# Altium PCB amc3302-v1.02.PcbDoc (part 2 of 2)
Units mm, origin at the board's own origin, x right, y up, seen from the top; angles counter-clockwise.
Board outline 100 x 75 mm, 4 copper layers (Top Layer, GND, VCC, Bottom Layer), stack 1.592 mm thick; 98 components, 51 nets, 268 pads, 520 vias.
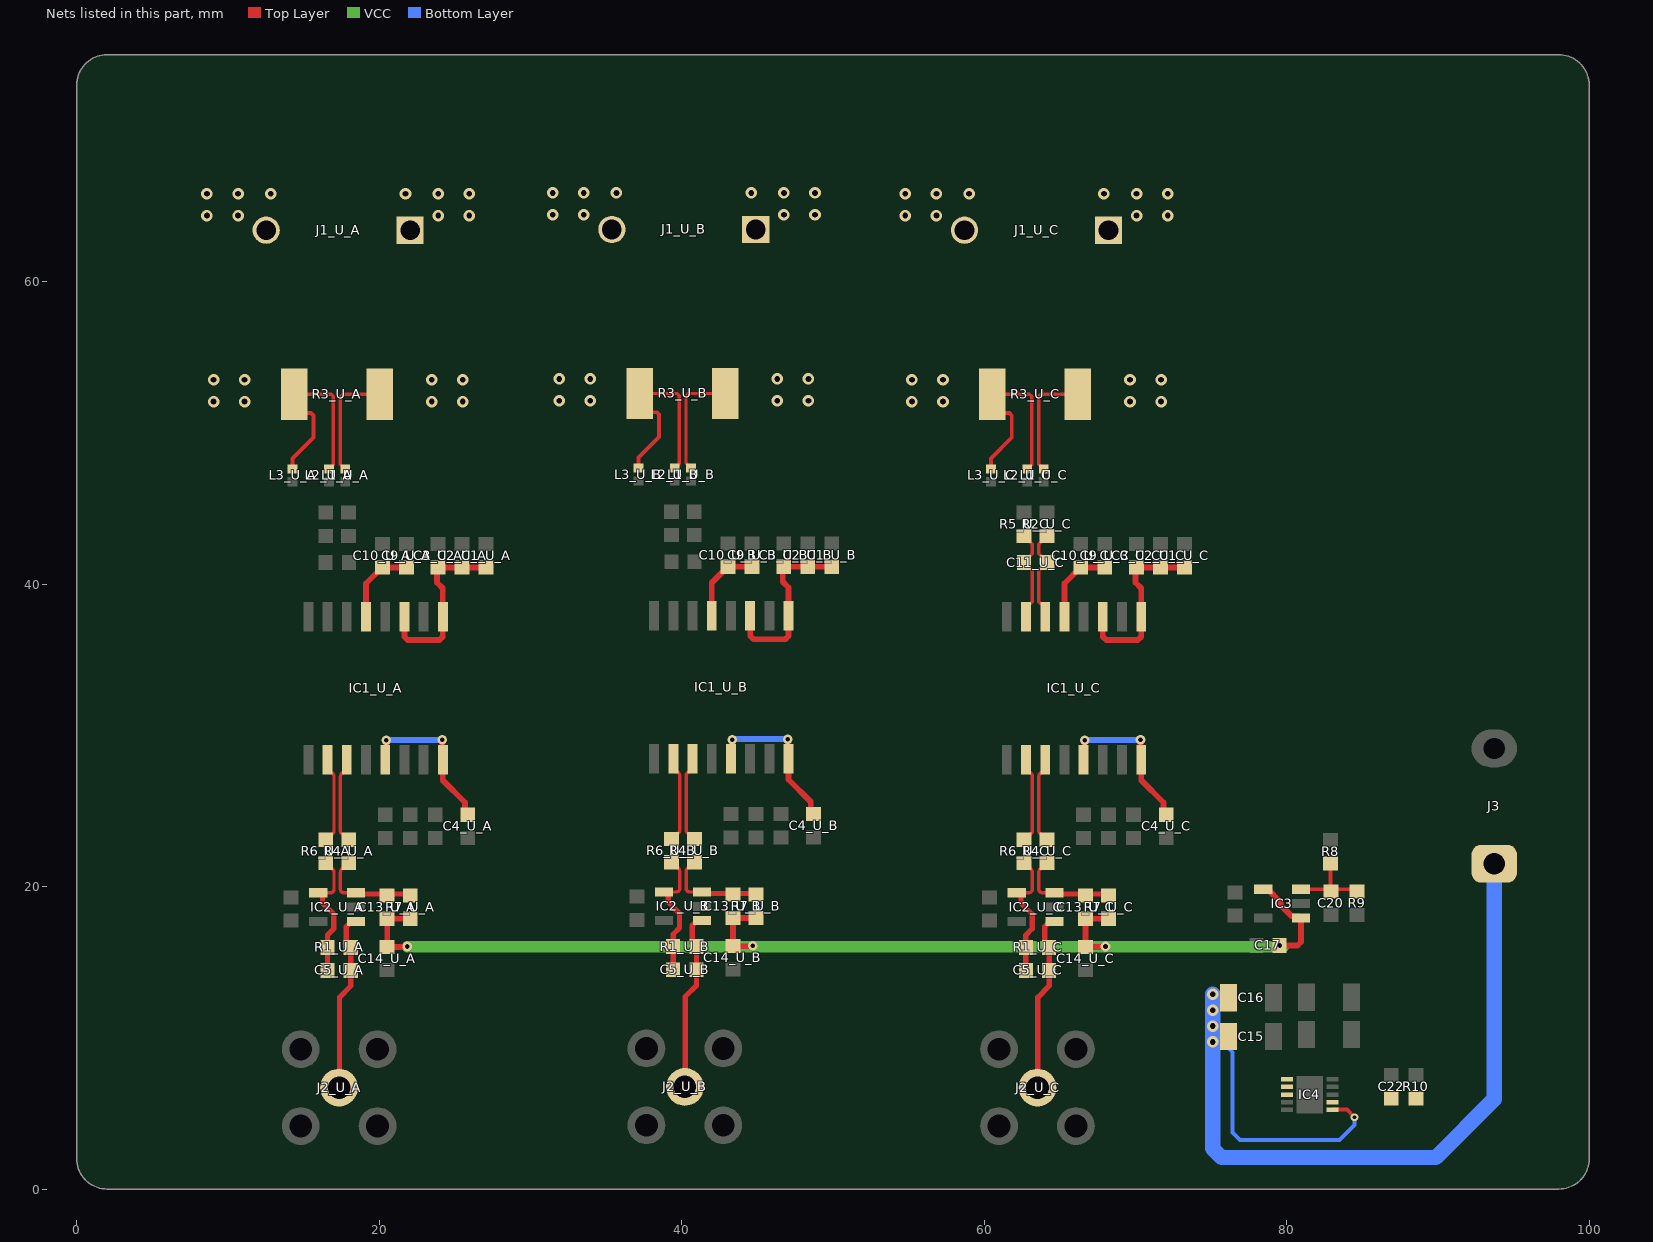
[diagram p4: the nets of this part, all layers, seen from the top]

## Via types
v1: diameter 0.559, hole 0.254, Top Layer to Bottom Layer, tented both sides, 284 vias
v2: diameter 0.635, hole 0.305, Top Layer to Bottom Layer, tented both sides, 115 vias
v3: diameter 0.508, hole 0.254, Top Layer to Bottom Layer, tented both sides, 62 vias
v4: diameter 0.762, hole 0.381, Top Layer to Bottom Layer, tented both sides, 58 vias
v5: diameter 0.508, hole 0.305, Top Layer to Bottom Layer, tented both sides, 1 vias

## Nets (pads, with @x,y where several pads share a name; then routed paths per layer and width w, separated by ;. In a path a pad name is that pad's centre, name@x,y a point inside that pad or via, vN(x,y) a via of type N, cw(c..) or ccw(c..) an arc to the next point about the centre after c; other vN are vias at no path point) (continued)
In_ic_U_C_N: C11_U_C.2 IC1_U_C.7 R5_U_C.2 | length 6.3
  Top Layer w0.22: R5_U_C.2@62.637,43.191 62.662,43.191 63.017,42.836 63.017,42.811 63.178,42.649 63.178,41.995 62.628,41.446 62.628,41.396 62.983,41.041 63.057,41.041 63.187,40.912 63.187,38.841 63.057,38.711 62.978,38.711 62.763,38.497 IC1_U_C.7@62.763,37.847
In_ic_U_C_P: C11_U_C.1 IC1_U_C.6 R2_U_C.2 | length 6.3
  Top Layer w0.22: IC1_U_C.6@64.033,37.847 64.033,38.497 63.819,38.711 63.739,38.711 63.61,38.841 63.61,40.912 63.739,41.041 63.814,41.041 64.168,41.396 64.168,41.446 63.602,42.012 63.602,42.642 63.771,42.811 63.771,42.836 64.126,43.191 R2_U_C.2@64.151,43.191
In_U_A_N: J1_U_A.2 L2_U_A.1 L3_U_A.1 R3_U_A.1 | length 13.8
  Top Layer w0.22: R3_U_A.1@14.371,52.554 16.818,52.554 16.967,52.405 16.967,47.885 16.7,47.618 L2_U_A.1@16.675,47.618
  Top Layer w0.254: L3_U_A.1@14.275,47.618 14.275,48.311 15.646,49.682 15.646,51.159 15.498,51.308 15.119,51.308 14.371,52.056 R3_U_A.1@14.371,52.554
  other v4: 9.042,52.07 11.1,52.07 9.042,53.518 11.1,53.518 8.611,64.364 10.668,64.364 8.611,65.811 10.668,65.811 12.827,65.811
In_U_A_P: J1_U_A.1 L1_U_A.1 R3_U_A.2 | length 7.6
  Top Layer w0.22: L1_U_A.1@17.758,47.618 17.733,47.618 17.424,47.926 17.424,52.405 17.573,52.554 R3_U_A.2@20.021,52.554
  other v4: 23.465,52.07 25.522,52.07 23.465,53.518 25.522,53.518 23.896,64.364 25.954,64.364 21.737,65.811 23.896,65.811 25.954,65.811
In_U_B_N: J1_U_B.2 L2_U_B.1 L3_U_B.1 R3_U_B.1 | length 13.8
  Top Layer w0.22: R3_U_B.1@37.231,52.605 39.678,52.605 39.827,52.456 39.827,47.936 39.56,47.669 L2_U_B.1@39.535,47.669
  Top Layer w0.254: L3_U_B.1@37.135,47.669 37.135,48.362 38.506,49.733 38.506,51.21 38.358,51.359 37.979,51.359 37.231,52.107 R3_U_B.1@37.231,52.605
  other v4: 31.902,52.121 33.96,52.121 31.902,53.569 33.96,53.569 31.471,64.414 33.528,64.414 31.471,65.862 33.528,65.862 35.687,65.862
In_U_B_P: J1_U_B.1 L1_U_B.1 R3_U_B.2 | length 7.6
  Top Layer w0.22: L1_U_B.1@40.618,47.669 40.593,47.669 40.284,47.977 40.284,52.456 40.433,52.605 R3_U_B.2@42.881,52.605
  other v4: 46.325,52.121 48.382,52.121 46.325,53.569 48.382,53.569 46.756,64.414 48.814,64.414 44.597,65.862 46.756,65.862 48.814,65.862
In_U_C_N: J1_U_C.2 L2_U_C.1 L3_U_C.1 R3_U_C.1 | length 13.8
  Top Layer w0.22: R3_U_C.1@60.548,52.554 62.996,52.554 63.144,52.405 63.144,47.885 62.878,47.618 L2_U_C.1@62.853,47.618
  Top Layer w0.254: L3_U_C.1@60.452,47.618 60.452,48.311 61.824,49.682 61.824,51.159 61.675,51.308 61.296,51.308 60.548,52.056 R3_U_C.1@60.548,52.554
  other v4: 55.22,52.07 57.277,52.07 55.22,53.518 57.277,53.518 54.788,64.364 56.845,64.364 54.788,65.811 56.845,65.811 59.004,65.811
In_U_C_P: J1_U_C.1 L1_U_C.1 R3_U_C.2 | length 7.6
  Top Layer w0.22: L1_U_C.1@63.935,47.618 63.91,47.618 63.602,47.926 63.602,52.405 63.75,52.554 R3_U_C.2@66.198,52.554
  other v4: 69.642,52.07 71.699,52.07 69.642,53.518 71.699,53.518 70.074,64.364 72.131,64.364 67.915,65.811 70.074,65.811 72.131,65.811
NetC1_U_A_1: C1_U_A.1 C2_U_A.1 C3_U_A.1 IC1_U_A.1 IC1_U_A.3 | length 12
  Top Layer w0.381: IC1_U_A.3@21.666,37.847 21.666,36.52 21.889,36.297 23.983,36.297 24.206,36.52 IC1_U_A.1@24.206,37.847 24.206,39.726 23.825,40.107 23.825,41.033 C3_U_A.1@23.889,41.097 C2_U_A.1@25.476,41.097 C1_U_A.1@27.063,41.097
NetC1_U_B_1: C1_U_B.1 C2_U_B.1 C3_U_B.1 IC1_U_B.1 IC1_U_B.3 | length 12
  Top Layer w0.381: IC1_U_B.3@44.526,37.897 44.526,36.571 44.749,36.347 46.843,36.347 47.066,36.571 IC1_U_B.1@47.066,37.897 47.066,39.776 46.685,40.157 46.685,41.084 C3_U_B.1@46.749,41.148 C2_U_B.1@48.336,41.148 C1_U_B.1@49.923,41.148
NetC1_U_C_1: C1_U_C.1 C2_U_C.1 C3_U_C.1 IC1_U_C.1 IC1_U_C.3 | length 12
  Top Layer w0.381: IC1_U_C.3@67.843,37.847 67.843,36.52 68.067,36.297 70.16,36.297 70.383,36.52 IC1_U_C.1@70.383,37.847 70.383,39.726 70.002,40.107 70.002,41.033 C3_U_C.1@70.066,41.097 C2_U_C.1@71.653,41.097 C1_U_C.1@73.241,41.097
NetC4_U_A_1: C4_U_A.1 IC1_U_A.13 IC1_U_A.16 | length 10.7
  Top Layer w0.381: IC1_U_A.13@20.396,28.397 20.476,28.477 v2(20.476,29.663) ; v2(24.161,29.698) 24.161,28.441 IC1_U_A.16@24.206,28.397 24.206,27.026 25.671,25.561 25.671,24.934 C4_U_A.1@25.857,24.748
  Bottom Layer w0.381: v2(20.476,29.663) 20.512,29.698 v2(24.161,29.698)
NetC4_U_B_1: C4_U_B.1 IC1_U_B.13 IC1_U_B.16 | length 10.7
  Top Layer w0.381: IC1_U_B.13@43.256,28.447 43.336,28.528 v2(43.336,29.713) ; v2(47.021,29.749) 47.021,28.492 IC1_U_B.16@47.066,28.447 47.066,27.076 48.531,25.612 48.531,24.985 C4_U_B.1@48.717,24.798
  Bottom Layer w0.381: v2(43.336,29.713) 43.372,29.749 v2(47.021,29.749)
NetC4_U_C_1: C4_U_C.1 IC1_U_C.13 IC1_U_C.16 | length 10.7
  Top Layer w0.381: IC1_U_C.13@66.573,28.397 66.654,28.477 v2(66.654,29.663) ; v2(70.339,29.698) 70.339,28.441 IC1_U_C.16@70.383,28.397 70.383,27.026 71.848,25.561 71.848,24.934 C4_U_C.1@72.034,24.748
  Bottom Layer w0.381: v2(66.654,29.663) 66.689,29.698 v2(70.339,29.698)
NetC9_U_A_1: C9_U_A.1 C10_U_A.1 IC1_U_A.5 | length 5.3
  Top Layer w0.381: IC1_U_A.5@19.126,37.847 19.126,40.042 20.181,41.097 C10_U_A.1@20.206,41.097 C9_U_A.1@21.794,41.097
NetC9_U_B_1: C9_U_B.1 C10_U_B.1 IC1_U_B.5 | length 5.3
  Top Layer w0.381: IC1_U_B.5@41.986,37.897 41.986,40.093 43.041,41.148 C10_U_B.1@43.066,41.148 C9_U_B.1@44.654,41.148
NetC9_U_C_1: C9_U_C.1 C10_U_C.1 IC1_U_C.5 | length 5.3
  Top Layer w0.381: IC1_U_C.5@65.303,37.847 65.303,40.042 66.359,41.097 C10_U_C.1@66.384,41.097 C9_U_C.1@67.971,41.097
NetC20_2: C20.2 IC3.3 R8.1 R9.2 | length 5.4
  Top Layer w0.254: IC3.3@80.955,19.822 C20.2@82.972,19.822 ; R8.1@82.906,21.531 82.906,19.888 C20.2@82.972,19.822 ; C20.2@82.982,19.812 C20.2@82.972,19.822 ; C20.2@82.982,19.822 84.592,19.822 R9.2@84.607,19.837
NetC22_1: C22.1 IC4.7 R10.1
op_U_A_N: C5_U_A.1 IC2_U_A.4 R1_U_A.1 R6_U_A.2 | length 8.8
  Top Layer w0.22: IC2_U_A.4@16.125,19.594 16.789,19.594 ccw(c16.789,19.814) 16.945,19.658 ccw(c16.789,19.814) 17.009,19.814 17.009,20.923 ccw(c16.648,20.923) 16.904,21.178 ccw(c16.847,21.122) 16.847,21.202 cw(c16.847,21.282) 16.791,21.225 R6_U_A.2@16.459,21.557
  Top Layer w0.349: IC2_U_A.4@15.971,19.594 16.125,19.594 16.25,19.468 16.25,18.921 17,18.171 17,17.216 16.578,16.794 R1_U_A.1@16.578,15.977 C5_U_A.1@16.578,14.453
op_U_A_P: C13_U_A.2 IC2_U_A.3 R4_U_A.2 R7_U_A.2 | length 6.8
  Top Layer w0.22: R4_U_A.2@17.983,21.557 17.652,21.225 cw(c17.595,21.282) 17.595,21.202 ccw(c17.595,21.122) 17.539,21.178 ccw(c17.794,20.923) 17.433,20.923 17.433,19.814 ccw(c17.654,19.814) 17.498,19.658 ccw(c17.654,19.814) 17.654,19.594 IC2_U_A.3@18.471,19.594
  Top Layer w0.33: IC2_U_A.3@18.471,19.594 18.561,19.504 21.957,19.504 R7_U_A.2@22.047,19.414
op_U_B_N: C5_U_B.1 IC2_U_B.4 R1_U_B.1 R6_U_B.2 | length 8.8
  Top Layer w0.22: IC2_U_B.4@38.985,19.644 39.649,19.644 ccw(c39.649,19.865) 39.805,19.709 ccw(c39.649,19.865) 39.869,19.865 39.869,20.974 ccw(c39.508,20.974) 39.764,21.229 ccw(c39.707,21.173) 39.707,21.253 cw(c39.707,21.333) 39.651,21.276 R6_U_B.2@39.319,21.607
  Top Layer w0.349: IC2_U_B.4@38.831,19.644 38.985,19.644 39.11,19.519 39.11,18.972 39.86,18.222 39.86,17.267 39.438,16.845 R1_U_B.1@39.438,16.027 C5_U_B.1@39.438,14.503
op_U_B_P: C13_U_B.2 IC2_U_B.3 R4_U_B.2 R7_U_B.2 | length 6.8
  Top Layer w0.22: R4_U_B.2@40.843,21.607 40.512,21.276 cw(c40.455,21.333) 40.455,21.253 ccw(c40.455,21.173) 40.399,21.229 ccw(c40.654,20.974) 40.293,20.974 40.293,19.865 ccw(c40.514,19.865) 40.358,19.709 ccw(c40.514,19.865) 40.514,19.644 IC2_U_B.3@41.331,19.644
  Top Layer w0.33: IC2_U_B.3@41.331,19.644 41.421,19.554 44.817,19.554 R7_U_B.2@44.907,19.464
op_U_C_N: C5_U_C.1 IC2_U_C.4 R1_U_C.1 R6_U_C.2 | length 8.8
  Top Layer w0.22: IC2_U_C.4@62.302,19.594 62.966,19.594 ccw(c62.966,19.814) 63.122,19.658 ccw(c62.966,19.814) 63.187,19.814 63.187,20.923 ccw(c62.826,20.923) 63.081,21.178 ccw(c63.024,21.122) 63.024,21.202 cw(c63.024,21.282) 62.968,21.225 R6_U_C.2@62.636,21.557
  Top Layer w0.349: IC2_U_C.4@62.148,19.594 62.302,19.594 62.427,19.468 62.427,18.921 63.177,18.171 63.177,17.216 62.755,16.794 R1_U_C.1@62.755,15.977 C5_U_C.1@62.755,14.453
op_U_C_P: C13_U_C.2 IC2_U_C.3 R4_U_C.2 R7_U_C.2 | length 6.8
  Top Layer w0.22: R4_U_C.2@64.16,21.557 63.829,21.225 cw(c63.773,21.282) 63.773,21.202 ccw(c63.773,21.122) 63.716,21.178 ccw(c63.971,20.923) 63.61,20.923 63.61,19.814 ccw(c63.831,19.814) 63.675,19.658 ccw(c63.831,19.814) 63.831,19.594 IC2_U_C.3@64.648,19.594
  Top Layer w0.33: IC2_U_C.3@64.648,19.594 64.738,19.504 68.134,19.504 R7_U_C.2@68.224,19.414
out_U_A: C5_U_A.2 IC2_U_A.1 J2_U_A.1 R1_U_A.2 | length 11.9
  Top Layer w0.349: J2_U_A.1@17.348,6.706 17.374,6.731 17.374,12.675 18.118,13.419 C5_U_A.2@18.118,14.453 R1_U_A.2@18.118,15.977 17.828,16.267 17.828,17.364 18.032,17.568 18.346,17.568 IC2_U_A.1@18.471,17.694
Out_U_A_N: IC1_U_A.10 R6_U_A.1 | length 5.7
  Top Layer w0.22: R6_U_A.1@16.459,23.097 16.791,23.428 cw(c16.847,23.371) 16.847,23.451 ccw(c16.847,23.531) 16.904,23.475 16.945,23.516 ccw(c16.789,23.672) 17.009,23.672 17.009,27.26 ccw(c16.664,27.26) 16.908,27.504 ccw(c16.841,27.436) 16.841,27.532 cw(c16.841,27.627) 16.773,27.56 16.694,27.639 cw(c16.953,27.898) 16.586,27.898 IC1_U_A.10@16.586,28.397
Out_U_A_P: IC1_U_A.11 R4_U_A.1 | length 5.7
  Top Layer w0.22: IC1_U_A.11@17.856,28.397 17.856,27.898 cw(c17.49,27.898) 17.749,27.639 17.669,27.56 cw(c17.602,27.627) 17.602,27.532 ccw(c17.602,27.436) 17.534,27.504 ccw(c17.778,27.26) 17.433,27.26 17.433,23.672 ccw(c17.654,23.672) 17.498,23.516 17.539,23.475 ccw(c17.595,23.531) 17.595,23.451 cw(c17.595,23.371) 17.652,23.428 R4_U_A.1@17.983,23.097
out_U_B: C5_U_B.2 IC2_U_B.1 J2_U_B.1 R1_U_B.2 | length 11.9
  Top Layer w0.349: J2_U_B.1@40.208,6.756 40.234,6.782 40.234,12.725 40.978,13.47 C5_U_B.2@40.978,14.503 R1_U_B.2@40.978,16.027 40.688,16.318 40.688,17.414 40.892,17.619 41.206,17.619 IC2_U_B.1@41.331,17.744
Out_U_B_N: IC1_U_B.10 R6_U_B.1 | length 5.7
  Top Layer w0.22: R6_U_B.1@39.319,23.147 39.651,23.479 cw(c39.707,23.422) 39.707,23.502 ccw(c39.707,23.582) 39.764,23.525 39.805,23.567 ccw(c39.649,23.723) 39.869,23.723 39.869,27.31 ccw(c39.524,27.31) 39.768,27.555 ccw(c39.701,27.487) 39.701,27.583 cw(c39.701,27.678) 39.633,27.611 39.554,27.69 cw(c39.813,27.949) 39.446,27.949 IC1_U_B.10@39.446,28.447
Out_U_B_P: IC1_U_B.11 R4_U_B.1 | length 5.7
  Top Layer w0.22: IC1_U_B.11@40.716,28.447 40.716,27.949 cw(c40.35,27.949) 40.609,27.69 40.529,27.611 cw(c40.462,27.678) 40.462,27.583 ccw(c40.462,27.487) 40.394,27.555 ccw(c40.638,27.31) 40.293,27.31 40.293,23.723 ccw(c40.514,23.723) 40.358,23.567 40.399,23.526 ccw(c40.455,23.582) 40.455,23.502 cw(c40.455,23.422) 40.512,23.479 R4_U_B.1@40.843,23.147
out_U_C: C5_U_C.2 IC2_U_C.1 J2_U_C.1 R1_U_C.2 | length 11.9
  Top Layer w0.349: J2_U_C.1@63.525,6.706 63.551,6.731 63.551,12.675 64.295,13.419 C5_U_C.2@64.295,14.453 R1_U_C.2@64.295,15.977 64.005,16.267 64.005,17.364 64.21,17.568 64.523,17.568 IC2_U_C.1@64.648,17.694
Out_U_C_N: IC1_U_C.10 R6_U_C.1 | length 5.7
  Top Layer w0.22: R6_U_C.1@62.636,23.097 62.968,23.428 cw(c63.024,23.371) 63.024,23.451 ccw(c63.024,23.531) 63.081,23.475 63.122,23.516 ccw(c62.966,23.672) 63.187,23.672 63.187,27.26 ccw(c62.841,27.26) 63.085,27.504 ccw(c63.018,27.436) 63.018,27.532 cw(c63.018,27.627) 62.95,27.56 62.871,27.639 cw(c63.13,27.898) 62.763,27.898 IC1_U_C.10@62.763,28.397
Out_U_C_P: IC1_U_C.11 R4_U_C.1 | length 5.7
  Top Layer w0.22: IC1_U_C.11@64.033,28.397 64.033,27.898 cw(c63.667,27.898) 63.926,27.639 63.847,27.56 cw(c63.779,27.627) 63.779,27.532 ccw(c63.779,27.436) 63.711,27.504 ccw(c63.956,27.26) 63.61,27.26 63.61,23.672 ccw(c63.831,23.672) 63.675,23.516 63.716,23.475 ccw(c63.773,23.531) 63.773,23.451 cw(c63.773,23.371) 63.829,23.428 R4_U_C.1@64.16,23.097
Vin: C15.1 C16.1 IC4.1 IC4.2 IC4.3 IC4.6 J3.1 | length 63.1
  Top Layer w0.254: IC4.6@83.034,5.248 83.982,5.248 v3(84.48,4.75)
  Bottom Layer w0.254: 75.844,9.398 76.073,9.398 76.429,9.042 76.429,3.734 76.911,3.251 83.49,3.251 84.48,4.242 v3(84.48,4.75)
  Bottom Layer w1.016: v4(75.108,12.878) v4(75.108,11.828) v4(75.108,10.778) v4(75.108,9.728) 75.108,2.678 75.703,2.083 89.865,2.083 93.726,5.944 J3.1@93.726,21.514
Vref: C13_U_A.1 C13_U_B.1 C13_U_C.1 C14_U_A.2 C14_U_B.2 C14_U_C.2 C17.2 IC3.1 IC3.4 R7_U_A.1 R7_U_B.1 R7_U_C.1 | length 78.3
  Top Layer w0.381: C14_U_A.2@20.523,16.01 C13_U_A.1@20.523,17.874 R7_U_A.1@22.047,17.874 ; C14_U_A.2@20.532,16.001 v2@21.802,16.001 ; v2@44.662,16.052 43.606,16.052 43.383,16.275 C13_U_B.1@43.383,17.924 R7_U_B.1@44.907,17.924 ; C14_U_C.2@66.7,16.01 C13_U_C.1@66.7,17.874 R7_U_C.1@68.224,17.874 ; C14_U_C.2@66.709,16.001 v2@67.979,16.001 ; IC3.4@78.455,19.822 78.755,19.822 79.602,18.976 79.602,18.769 80.339,18.032 80.846,18.032 IC3.1@80.955,17.922 80.955,16.338 80.721,16.104 v5(79.535,16.104)
  VCC w0.762: v2(21.844,16.035) v5@79.764,16.035
  other v2: 68.021,16.035 44.704,16.086
pads on no net: IC1_U_A.4 IC1_U_A.14 IC1_U_B.4 IC1_U_B.14 IC1_U_C.4 IC1_U_C.14 IC4.4

## Polygon pours and split planes (outlines as drawn)
GND on Top Layer "GND_L01_P012" (solid, remove dead copper, pour order 49): 9.55,29.896 9.55,1.778 10.744,0.584 93.447,0.584 96.266,3.404 96.266,29.921 94.996,31.191 10.846,31.191
In_U_C_P on Top Layer "IN_U_C_P_L01_P007" (solid, pour order 36): 73.325,51.206 72.995,50.876 66.365,50.876 66.365,53.315 65.603,54.077 65.603,66.77 65.908,67.056 72.918,67.056 73.325,66.65
In_U_C_N on Top Layer "IN_U_C_N_L01_P016" (solid, pour order 55): 53.594,51.206 53.924,50.876 60.554,50.876 60.554,53.315 61.316,54.077 61.316,66.77 61.011,67.056 54,67.056 53.594,66.65
NetC1_U_C_1 on Top Layer "NETC1_U_C_1_L01_P011" (solid, pour order 48): 69.596,41.453 69.596,40.056 70.256,39.395 73.355,39.395 73.889,39.929 73.889,41.478 73.812,41.554 69.647,41.554
HGND_U_C on Top Layer "HGND_U_C_L01_P008" (solid, pour order 39): 65.456,45.212 65.456,42.469 65.837,42.088 73.838,42.088 73.838,42.113 74.32,42.596 74.32,45.161 73.939,45.542 65.786,45.542
HGND_U_C on Top Layer "HGND_U_C_L01_P010" (solid, pour order 45): 61.849,38.71 61.595,38.964 61.595,40.284 61.062,40.818 61.062,46.355 60.731,46.685 59.919,46.685 59.69,46.457 59.69,39.497 61.379,37.808 61.798,38.227 61.798,38.71
+3V3 on Top Layer "+3V3_L01_P000" (solid, pour order 24): 65.507,27.838 65.938,27.407 65.938,26.821 66.376,26.383 68.841,26.383 70.307,24.917 70.307,24.46 65.532,24.46 64.999,24.994 64.999,27.48
NetC9_U_C_1 on Top Layer "NETC9_U_C_1_L01_P009" (solid, pour order 42): 66.472,39.599 67.843,39.599 68.478,40.234 68.478,41.427 68.377,41.529 65.608,41.529 64.973,40.894 64.973,38.735 65.608,38.735
In_U_B_P on Top Layer "IN_U_B_P_L01_P007" (solid, pour order 35): 50.008,51.257 49.677,50.927 43.048,50.927 43.048,53.365 42.286,54.127 42.286,66.821 42.591,67.107 49.601,67.107 50.008,66.7
In_U_B_N on Top Layer "IN_U_B_N_L01_P016" (solid, pour order 54): 30.277,51.257 30.607,50.927 37.236,50.927 37.236,53.365 37.998,54.127 37.998,66.821 37.694,67.107 30.683,67.107 30.277,66.7
NetC1_U_B_1 on Top Layer "NETC1_U_B_1_L01_P011" (solid, pour order 47): 46.279,41.504 46.279,40.107 46.939,39.446 50.038,39.446 50.571,39.98 50.571,41.529 50.495,41.605 46.33,41.605
HGND_U_B on Top Layer "HGND_U_B_L01_P008" (solid, pour order 38): 42.139,45.263 42.139,42.52 42.52,42.139 50.521,42.139 50.521,42.164 51.003,42.647 51.003,45.212 50.622,45.593 42.469,45.593
HGND_U_B on Top Layer "HGND_U_B_L01_P010" (solid, pour order 44): 38.532,38.76 38.278,39.014 38.278,40.335 37.744,40.869 37.744,46.406 37.414,46.736 36.601,46.736 36.373,46.507 36.373,39.548 38.062,37.859 38.481,38.278 38.481,38.76
+3V3 on Top Layer "+3V3_L01_P000" (solid, pour order 23): 42.189,27.889 42.621,27.457 42.621,26.872 43.059,26.434 45.524,26.434 46.99,24.968 46.99,24.511 42.215,24.511 41.681,25.044 41.681,27.531
NetC9_U_B_1 on Top Layer "NETC9_U_B_1_L01_P009" (solid, pour order 41): 43.155,39.649 44.526,39.649 45.161,40.284 45.161,41.478 45.06,41.58 42.291,41.58 41.656,40.945 41.656,38.786 42.291,38.786
In_U_A_N on Top Layer "IN_U_A_N_L01_P016" (solid, pour order 53): 7.417,51.206 7.747,50.876 14.376,50.876 14.376,53.315 15.138,54.077 15.138,66.77 14.834,67.056 7.823,67.056 7.417,66.65
+3V3 on Top Layer "+3V3_L01_P000" (solid, pour order 22): 19.329,27.838 19.761,27.407 19.761,26.821 20.199,26.383 22.664,26.383 24.13,24.917 24.13,24.46 19.355,24.46 18.821,24.994 18.821,27.48
Vin on Top Layer "VIN_L01_P001" (solid, pour order 25): 75.387,7.417 76.657,6.147 80.289,6.147 80.289,7.29 80.162,7.417 77.673,7.417 76.708,8.382 76.708,13.64 75.54,13.64 75.387,13.487
+3V3 on Top Layer "+3V3_L01_P002" (solid, pour order 26): 82.601,13.259 82.702,13.36 84.684,13.36 85.166,12.878 85.166,8.204 84.074,7.112 82.753,7.112 82.601,7.264
GND on Top Layer "GND_L01_P013" (solid, pour order 50): 81.559,13.564 81.61,13.513 81.89,13.513 81.89,13.868 82.144,14.122 86.055,14.122 86.385,13.792 86.385,7.391 86.589,7.188 89.027,7.188 89.027,14.503 88.087,15.443 82.347,15.443 81.559,14.656
NetC22_1 on Top Layer "NETC22_1_L01_P003" (solid, pour order 27): 83.388,5.893 83.439,5.944 84.506,5.944 85.039,6.477 89.052,6.477 89.052,5.41 88.976,5.334 84.607,5.334 84.303,5.639 83.363,5.639 83.287,5.715
NetC1_U_A_1 on Top Layer "NETC1_U_A_1_L01_P011" (solid, pour order 46): 23.419,41.453 23.419,40.056 24.079,39.395 27.178,39.395 27.711,39.929 27.711,41.478 27.635,41.554 23.47,41.554
HGND_U_A on Top Layer "HGND_U_A_L01_P010" (solid, pour order 43): 15.672,38.71 15.418,38.964 15.418,40.284 14.884,40.818 14.884,46.355 14.554,46.685 13.741,46.685 13.513,46.457 13.513,39.497 15.202,37.808 15.621,38.227 15.621,38.71
NetC9_U_A_1 on Top Layer "NETC9_U_A_1_L01_P009" (solid, pour order 40): 20.295,39.599 21.666,39.599 22.301,40.234 22.301,41.427 22.2,41.529 19.431,41.529 18.796,40.894 18.796,38.735 19.431,38.735
HGND_U_A on Top Layer "HGND_U_A_L01_P008" (solid, pour order 37): 19.279,45.212 19.279,42.469 19.66,42.088 27.661,42.088 27.661,42.113 28.143,42.596 28.143,45.161 27.762,45.542 19.609,45.542
In_U_A_P on Top Layer "IN_U_A_P_L01_P007" (solid, pour order 34): 27.148,51.206 26.817,50.876 20.188,50.876 20.188,53.315 19.426,54.077 19.426,66.77 19.731,67.056 26.741,67.056 27.148,66.65
In_U_C_P on Bottom Layer "IN_U_C_P_L04_P021" (solid, pour order 70): 73.325,51.206 72.995,50.876 66.365,50.876 66.365,53.315 65.603,54.077 65.603,66.77 65.908,67.056 72.918,67.056 73.325,66.65
In_U_C_N on Bottom Layer "IN_U_C_N_L04_P018" (solid, pour order 61): 53.594,51.206 53.924,50.876 60.554,50.876 60.554,53.315 61.316,54.077 61.316,66.77 61.011,67.056 54,67.056 53.594,66.65
HGND_U_C on Bottom Layer "HGND_U_C_L04_P005" (solid, pour order 30): 60.046,45.187 60.35,45.491 74.041,45.491 74.346,45.187 74.346,42.57 74.092,42.316 60.452,42.316 60.046,42.723
In_U_B_P on Bottom Layer "IN_U_B_P_L04_P021" (solid, pour order 69): 50.008,51.257 49.677,50.927 43.048,50.927 43.048,53.365 42.286,54.127 42.286,66.821 42.591,67.107 49.601,67.107 50.008,66.7
In_U_B_N on Bottom Layer "IN_U_B_N_L04_P018" (solid, pour order 60): 30.277,51.257 30.607,50.927 37.236,50.927 37.236,53.365 37.998,54.127 37.998,66.821 37.694,67.107 30.683,67.107 30.277,66.7
HGND_U_B on Bottom Layer "HGND_U_B_L04_P005" (solid, pour order 29): 36.728,45.237 37.033,45.542 50.724,45.542 51.029,45.237 51.029,42.621 50.775,42.367 37.135,42.367 36.728,42.774
In_U_A_P on Bottom Layer "IN_U_A_P_L04_P021" (solid, pour order 68): 27.148,51.206 26.817,50.876 20.188,50.876 20.188,53.315 19.426,54.077 19.426,66.77 19.731,67.056 26.741,67.056 27.148,66.65
In_U_A_N on Bottom Layer "IN_U_A_N_L04_P018" (solid, pour order 59): 7.417,51.206 7.747,50.876 14.376,50.876 14.376,53.315 15.138,54.077 15.138,66.77 14.834,67.056 7.823,67.056 7.417,66.65
GND on Bottom Layer "GND_L04_P015" (solid, remove dead copper, pour order 52): 9.55,29.896 9.55,1.778 10.744,0.584 93.447,0.584 96.266,3.404 96.266,29.921 94.996,31.191 10.846,31.191
HGND_U_A on Bottom Layer "HGND_U_A_L04_P005" (solid, pour order 28): 13.868,45.187 14.173,45.491 27.864,45.491 28.169,45.187 28.169,42.57 27.915,42.316 14.275,42.316 13.868,42.723
In_U_C_P on VCC "IN_U_C_P_L03_P020" (solid, pour order 67): 73.325,51.206 72.995,50.876 66.365,50.876 66.365,53.315 65.603,54.077 65.603,66.77 65.908,67.056 72.918,67.056 73.325,66.65
In_U_C_N on VCC "IN_U_C_N_L03_P017" (solid, pour order 58): 53.594,51.206 53.924,50.876 60.554,50.876 60.554,53.315 61.316,54.077 61.316,66.77 61.011,67.056 54,67.056 53.594,66.65
In_U_B_P on VCC "IN_U_B_P_L03_P020" (solid, pour order 66): 50.008,51.257 49.677,50.927 43.048,50.927 43.048,53.365 42.286,54.127 42.286,66.821 42.591,67.107 49.601,67.107 50.008,66.7
In_U_B_N on VCC "IN_U_B_N_L03_P017" (solid, pour order 57): 30.277,51.257 30.607,50.927 37.236,50.927 37.236,53.365 37.998,54.127 37.998,66.821 37.694,67.107 30.683,67.107 30.277,66.7
In_U_A_P on VCC "IN_U_A_P_L03_P020" (solid, pour order 65): 27.148,51.206 26.817,50.876 20.188,50.876 20.188,53.315 19.426,54.077 19.426,66.77 19.731,67.056 26.741,67.056 27.148,66.65
In_U_A_N on VCC "IN_U_A_N_L03_P017" (solid, pour order 56): 7.417,51.206 7.747,50.876 14.376,50.876 14.376,53.315 15.138,54.077 15.138,66.77 14.834,67.056 7.823,67.056 7.417,66.65
+3V3 on VCC "+3V3_L03_P014" (solid, pour order 51): 14.554,29.642 11.582,26.67 11.582,7.188 13.818,4.953 90.246,4.953 90.246,28.55 89.154,29.642
In_U_C_P on GND "IN_U_C_P_L02_P019" (solid, pour order 64): 73.325,51.206 72.995,50.876 66.365,50.876 66.365,53.315 65.603,54.077 65.603,66.77 65.908,67.056 72.918,67.056 73.325,66.65
In_U_C_N on GND "IN_U_C_N_L02_P006" (solid, pour order 33): 53.594,51.206 53.924,50.876 60.554,50.876 60.554,53.315 61.316,54.077 61.316,66.77 61.011,67.056 54,67.056 53.594,66.65
In_U_B_P on GND "IN_U_B_P_L02_P019" (solid, pour order 63): 50.008,51.257 49.677,50.927 43.048,50.927 43.048,53.365 42.286,54.127 42.286,66.821 42.591,67.107 49.601,67.107 50.008,66.7
In_U_B_N on GND "IN_U_B_N_L02_P006" (solid, pour order 32): 30.277,51.257 30.607,50.927 37.236,50.927 37.236,53.365 37.998,54.127 37.998,66.821 37.694,67.107 30.683,67.107 30.277,66.7
In_U_A_P on GND "IN_U_A_P_L02_P019" (solid, pour order 62): 27.148,51.206 26.817,50.876 20.188,50.876 20.188,53.315 19.426,54.077 19.426,66.77 19.731,67.056 26.741,67.056 27.148,66.65
In_U_A_N on GND "IN_U_A_N_L02_P006" (solid, pour order 31): 7.417,51.206 7.747,50.876 14.376,50.876 14.376,53.315 15.138,54.077 15.138,66.77 14.834,67.056 7.823,67.056 7.417,66.65

## Keep-outs
Keep-Out Layer:
  circle w0.013: c97,3 r1.6
  circle w0.013: c97,72 r1.6
  circle w0.013: c3,72 r1.6
  circle w0.013: c3,3 r1.6
  lines w0.1: 0,2 0,73 ; 2,0 98,0 ; 2,75 98,75 ; 100,2 100,73 ; 28.118,46.431 29.118,46.431 29.118,67.437 28.118,67.437 28.118,46.431
  lines w0.127: 0,2 ccw(c2,2) 2,0 ; 0,73 cw(c2,73) 2,75 ; 98,0 ccw(c98,2) 100,2 ; 98,75 cw(c98,73) 100,73

## Other copper
Top Layer:
  rectangle net Vin: 74.549,9.017 76.708,13.716
  pour cut-out: 96.19,6.325 94.615,4.75 90.386,0.521 90.5,0.406 98.501,0.406 99.365,1.27 99.365,4.216 97.15,6.431
  pour cut-out: 82.144,14.097 81.915,13.868 81.915,13.487 85.801,13.487 85.801,13.894 85.598,14.097
  pour cut-out: 81.305,13.538 81.305,14.859 82.144,15.697 88.544,15.697 89.51,14.732 89.51,6.706 89.421,6.706 89.292,6.576 89.152,6.716 89.152,14.684 88.367,15.469 82.321,15.469 81.509,14.656 81.509,13.386 81.458,13.386
  text "1" at 97.79,53.569 h1.5 r270
GND:
  text "2" at 97.79,52.817 h1.5 r270
VCC:
  text "3" at 97.802,51.153 h1.5 r270
Bottom Layer:
  pour cut-out: 96.19,6.325 94.615,4.75 90.386,0.521 90.5,0.406 98.501,0.406 99.365,1.27 99.365,4.216 97.15,6.431
  region net Vin: 74.803,13.64 76.352,13.64 76.352,9.169 76.251,9.068 76.225,9.093 74.574,9.093 74.574,13.564 74.651,13.64
  text "4" at 97.79,50.19 h1.5 r270

## Silkscreen, mask and mechanical layers (free items; w line width, h text height)
Top Overlay:
  text "AMC3302 GAIN 41" at 81.534,63.846 h1.5
  text "GND" at 84.125,28.794 h1.5
  text "VCC" at 84.353,21.504 h1.5
  text "M3" at 2.21,5.981 h1.5
Top Solder:
  region: 97.638,53.81 98.882,53.81 98.882,49.924 97.638,49.924
Bottom Solder:
  region: 97.638,53.81 98.882,53.81 98.882,49.924 97.638,49.924
Mechanical 1:
  text "层叠信息JLC04161H-7628" at -30.277,52.045 h1.52
  text "单端50 ohm  13.75mil" at -30.277,50.267 h1.52
  text "差分100 ohm  8.68mil  线距8mil" at -30.277,48.743 h1.52